# Altium PCB BMS.PcbDoc (part 2 of 3)
Units mm, origin at the board's own origin, x right, y up, seen from the top; angles counter-clockwise.
Board outline 84 x 70 mm, 4 copper layers (PWR, GND1, GND2, SIG), stack 1.586 mm thick; 200 components, 151 nets, 637 pads, 135 vias.
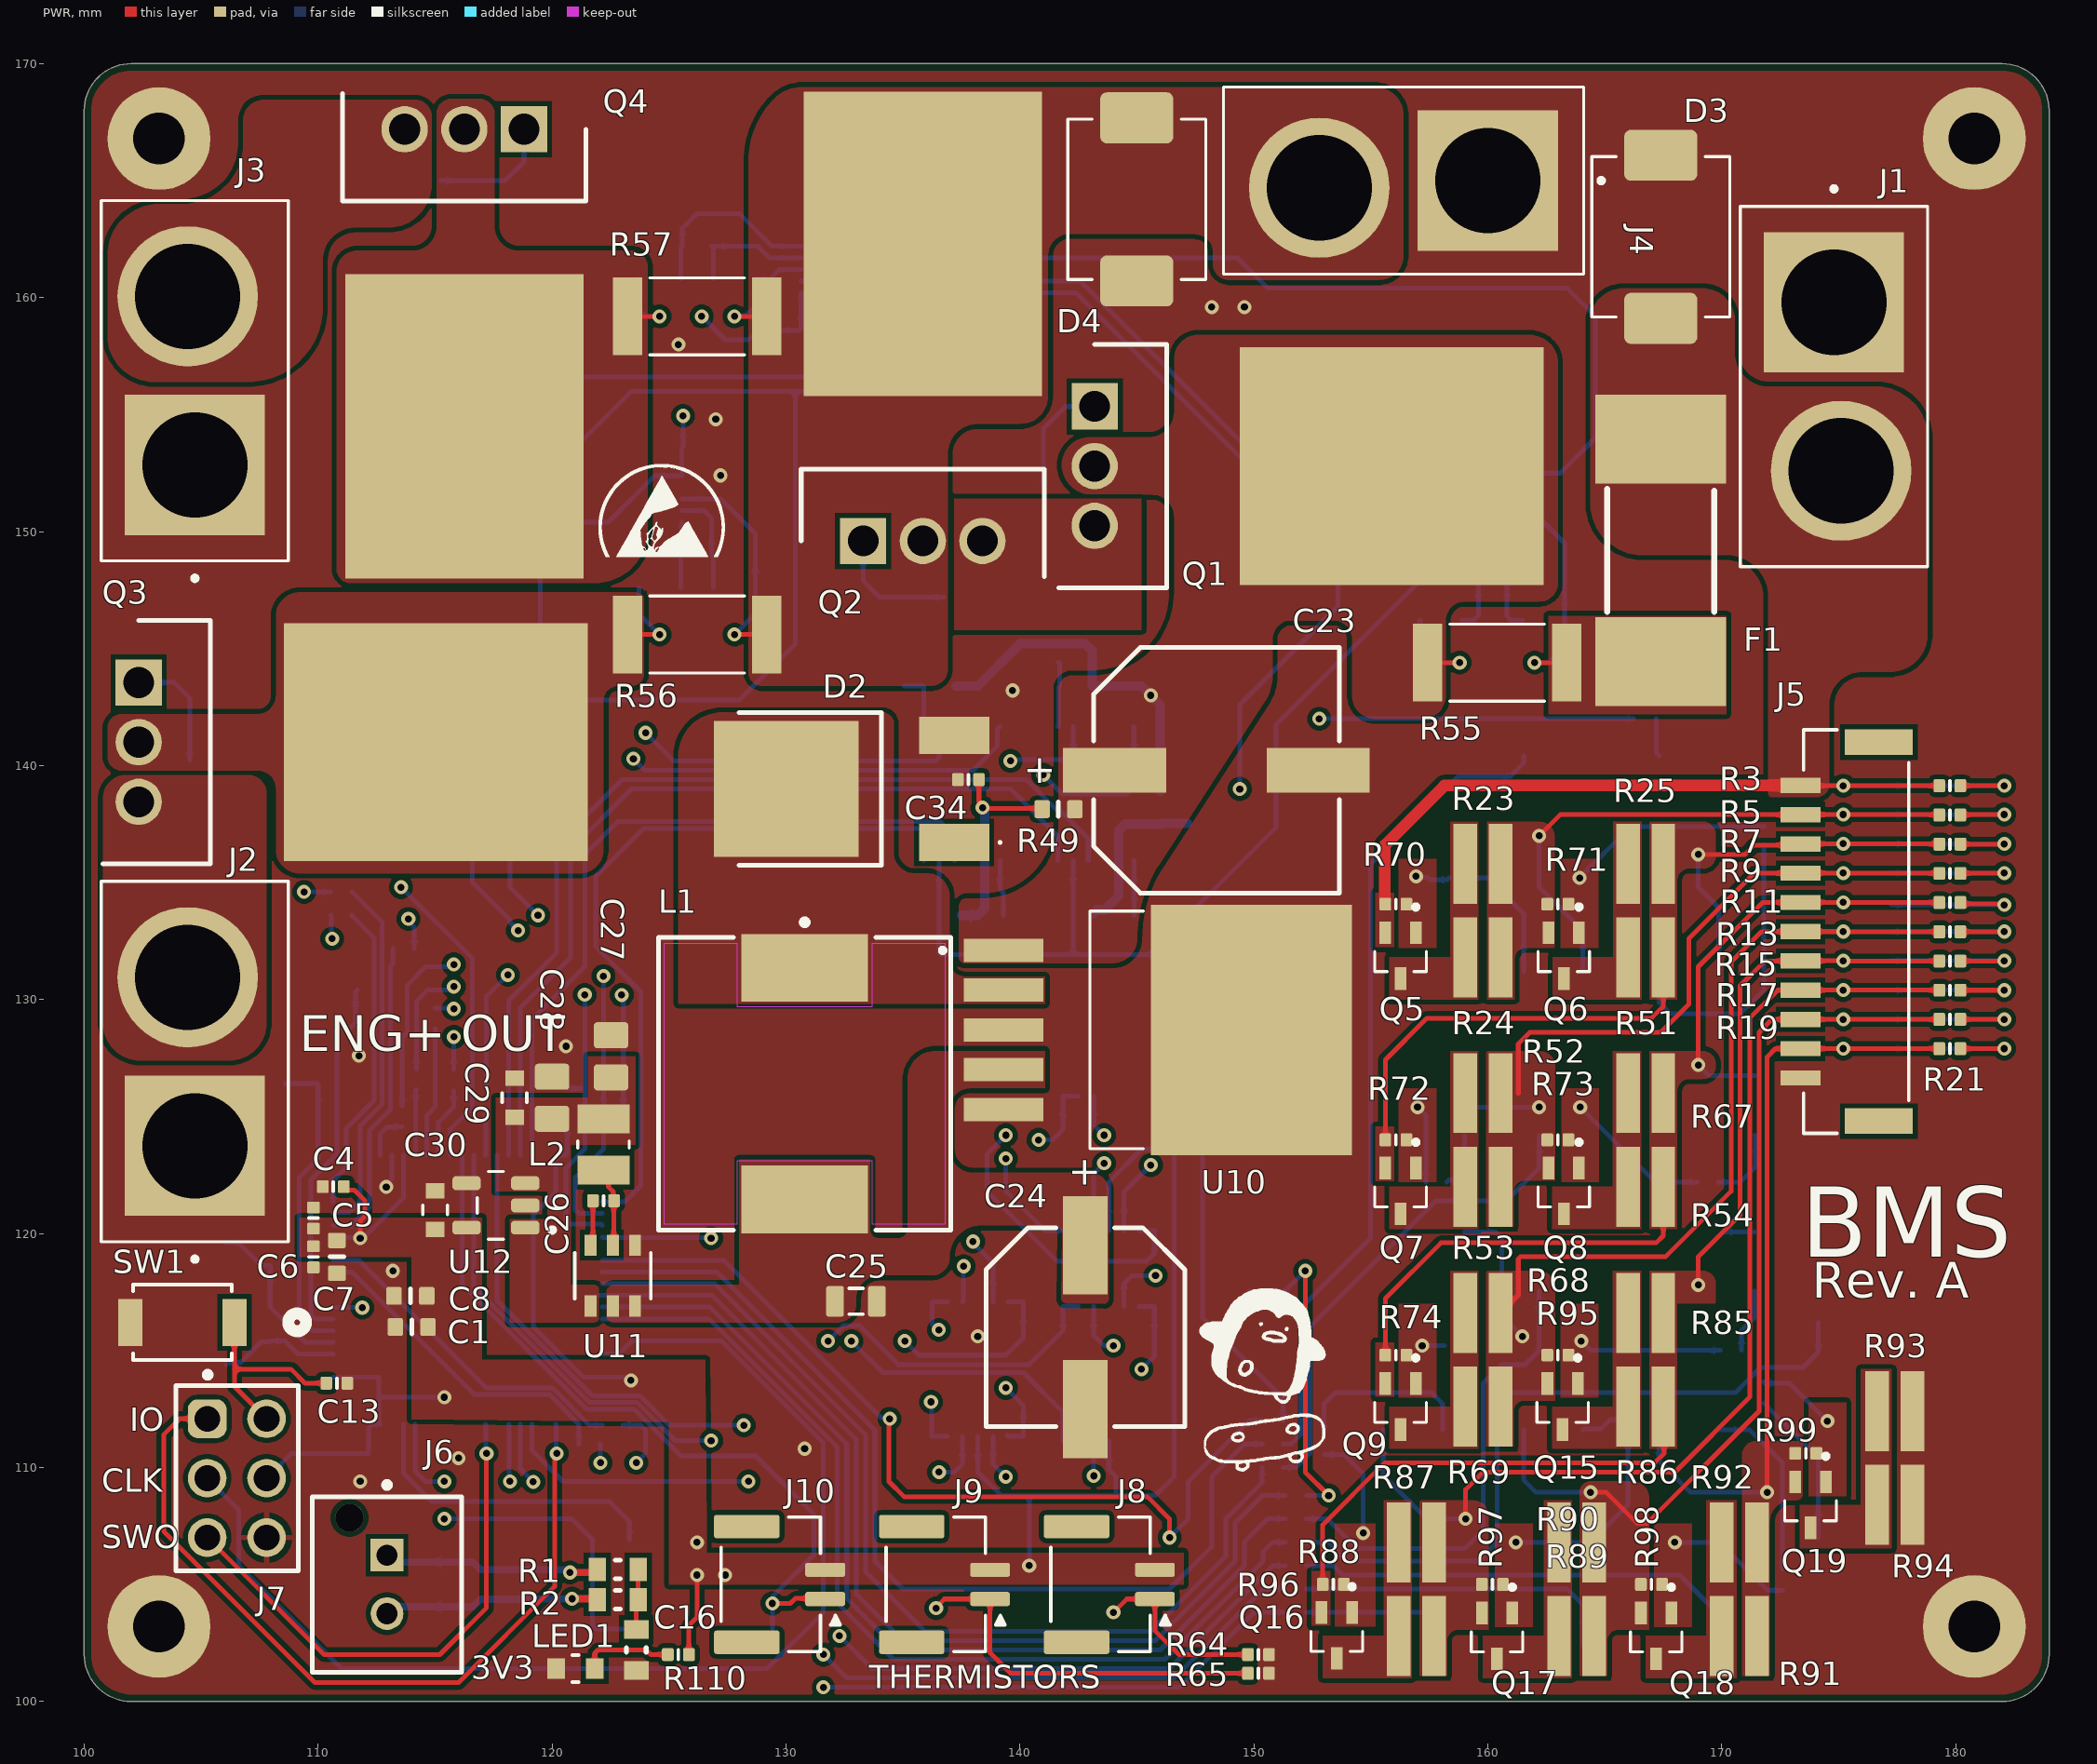
[diagram p0: PWR view]

## Part data (continued)
XTAL1: library part CMP-036-000000-1, "No Description Available", Manufacturer_Name="ECS International", Copyright="Copyright (C) 2025 Ultra Librarian. All rights reserved.", Design Item ID=ECS-.327-6-17X-TR, Manufacturer_Part_Number=ECS-.327-6-17X-TR, RefDes=RefDes, Source=ECS-P327-6-17X-TR.SchLib, Type=Type
XTAL2: library part CMP-039-000000-5, "No Description Available", Frequency=25MHz, Manufacturer_Name=YXC, Copyright="Copyright (C) 2025 Ultra Librarian. All rights reserved.", Design Item ID=X322525MOB4SI, Manufacturer_Part_Number=X322525MOB4SI, RefDes=RefDes, Source=X322525MOB4SI.SchLib, Type=Type

## Free pads (board coordinates)
  round 4.4 hole 2.2: 2(103.2,103.2) 2(103.2,166.8) 2(180.8,103.2) 2(180.8,166.8)

## Via types
v1: diameter 0.6, hole 0.3, PWR to SIG, 135 vias

## Nets (pads, with @x,y where several pads share a name; then routed paths per layer and width w, separated by ;. In a path a pad name is that pad's centre, name@x,y a point inside that pad or via, vN(x,y) a via of type N, cw(c..) or ccw(c..) an arc to the next point about the centre after c; other vN are vias at no path point)
ADC123_IN1-I2C3_SCL: U1.8
ADC123_IN2-I2C3_SDA: U1.9
AUX+: J3.2 Q4.3 R46.2
AUX+_SHUNTED: Q4.2 R42.2 R57.2 | length 3.7
  PWR w0.2: R57.2@123.225,159.2 v1(124.6,159.2)
  SIG w0.2: R42.2@123.71,160.8 123.71,159.49 124,159.2 v1(124.6,159.2)
AUX_DSG: Q4.1 R46.1 U14.12 | length 48.6
  GND1 w0.2: Q4.1@118.8,167.2 118.8,145 122.4,141.4 v1(124,141.4)
  SIG w0.2: R46.1@115.25,165 118,165 118.8,165.8 Q4.1@118.8,167.2 ; v1(124,141.4) 125.2,140.2 136.4,140.2 136.55,140.35 U14.12@136.55,141.67
AUX_DSG_EN: U1.33 U14.6 | length 32.1
  SIG w0.2: U1.33@122.15,121.35 123.1,121.35 123.8,122.05 123.8,130.325 121.86,132.265 121.86,135.26 123.911,137.311 135.689,137.311 135.9,137.1 U14.6@135.9,135.93
B+: D3.C F1.1 J1.2 J5.1 Q5.2 R3.2 R70.1 | length 27.3
  PWR w0.2: J5.1@173.371,139.15 173.383,139.138 v1(175.201,139.138) R3.2@179.305,139.138
  PWR w0.5: R70.1@155.625,134.075 155.6,134.1 155.6,136.6 158.15,139.15 J5.1@173.371,139.15
B+_FUSED: F1.2 R36.2 R55.1 U7.8 | length 11.9
  PWR w0.2: v1(162,144.4) R55.1@163.375,144.4
  SIG w0.2: U7.8@159.6,151.5 161.3,151.5 163.29,149.51 R36.2@163.29,146.2 163.29,145.09 162.6,144.4 v1(162,144.4)
BAT1: C32.2 C35.1 R47.2 U13.2 | length 7.4
  SIG w0.2: R47.2@146,137.5 R47.2@146.025,137.525 ; C32.2@147.175,137.525 C32.2@147.2,137.55
  SIG w0.4: C35.1@143.1,133.646 143.28,133.826 143.626,133.826 144.225,134.425 U13.2@144.225,135.93 144.225,137.225 144.5,137.5 R47.2@146,137.5 ; R47.2@146.025,137.525 C32.2@147.175,137.525
BAT2: C34.2 C36.1 R49.2 U14.2 | length 9.3
  PWR w0.2: C34.2@138.25,139.4 138.25,138.458 138.4,138.308 v1(138.4,138.2) 138.431,138.169 140.919,138.169 R49.2@140.95,138.137
  SIG w0.4: C36.1@137.5,133.6 138.2,133.6 138.5,133.9 U14.2@138.5,135.93 ; v1(138.4,138.2) 138.4,138.146 138.5,138.046 U14.2@138.5,135.93
BMS3.3V: C1.1 C2.2 C3.2 C4.2 C5.2 C6.1 C7.1 C8.1 C14.1 C15.1 C18.2 C20.2 C22.2 C30.2 J7.4 J8.2 J9.2 J10.2 R38.2 R58.2 R59.2 R110.2 U1.1 U1.13 U1.19 U1.32 U1.48 U1.64 U2.3 U3.4 U4.4 U5.4 U7.6 U8.1 U8.6 U9.2 U9.6 U12.5 U13.5 U14.5 | length 219.7
  PWR w0.2: C4.2@111.1,122 111.239,121.861 111.539,121.861 112,121.4 112,120.754 111.8,120.554 v1(111.8,119.8) ; R110.2@125.85,102 125.85,103.25 126.2,103.6 v1(126.2,105.4)
  GND1 w0.2: v1(125.6,154.946) 125.6,155.6 126.4,156.4 v1(126.4,159.2)
  GND2 w0.2: v1(122.98,130.193) 123.6,129.573 123.6,121.94 123.174,121.514 123.174,117.771 123.376,117.569 v1(123.376,113.717)
  SIG w0.2: J7.4@107.8,109.54 108.86,110.6 C2.2@112.15,110.6 112.15,111.655 112.345,111.85 U1.64@112.65,111.85 112.6,111.9 112.6,113 ; U1.1@110.65,113.85 112.6,113.85 112.6,113 ; U1.13@110.65,119.85 110.675,119.825 111.775,119.825 v1(111.8,119.8) 111.908,119.8 112.047,119.939 112.064,119.939 113.654,121.529 U1.19@113.654,123.346 ; v1(115.4,113) 112.6,113 ; R59.2@120.63,125.35 120.64,125.34 120.64,124.61 C3.2@120.65,124.6 120.65,123.435 120.565,123.35 U1.32@120.15,123.35 120.15,121.75 119.2,120.8 119.2,116 121.35,113.85 U1.48@122.15,113.85 123.135,113.85 123.268,113.717 v1(123.376,113.717) ; U8.1@121.25,150.4 122.4,150.4 124.4,152.4 U8.6@125.55,152.4 125.55,153.575 C20.2@125.575,153.6 125.6,153.625 v1(125.6,154.946) ; v1(122.98,130.193) 123.05,130.123 R58.2@123.05,125.4 ; v1(126.4,159.2) 127.4,158.2 128.4,158.2 128.8,158.6 C22.2@130.575,158.6 130.65,158.675 U9.6@130.65,160.2 132.6,160.2 134.1,161.7 U9.2@134.95,161.7 149.3,161.7 150.6,160.4 163.4,160.4 164.6,159.2 164.6,154 163.1,152.5 U7.6@159.6,152.5 ; U14.5@136.55,135.93 136.55,132 136.625,131.925 142.275,131.925 ; U4.4@138.2,111.33 138.2,109.8 139.2,108.8 140.4,108.8 ; v1(140.4,105.8) 140.4,108.8 ; U13.5@142.275,135.93 142.275,131.925 ; U3.4@143.8,111.13 143.8,109.919 144.1,109.619 144.1,108.85 144.05,108.8 ; U5.4@143.8,120.13 143.8,122.2 145.2,123.6 146.6,123.6 ; R38.2@155.45,149.6 158.2,149.6 ; C18.2@159.775,153.6 159.775,152.54 159.735,152.5 U7.6@159.6,152.5 ; 140.4,108.8 144.05,108.8 ; 142.275,131.925 145.525,131.925 ; 144.05,108.8 145.791,108.8 146.6,109.609 146.6,123.6 ; 145.525,131.925 150.946,137.346 150.946,141.746 158.2,149 158.2,149.6 ; 145.525,131.925 146.6,130.85 146.6,123.6 ; 158.2,149.6 158.2,152.2 158.5,152.5 U7.6@159.6,152.5
  other v1: 127.4,105.4 126.2,106.8
BMS5V: C27.2 C28.2 C29.2 L2.2 U11.1 U12.1 U12.3
BMS12V: C24.1 C25.1 L1.2 U10.4 U11.2 U11.3
BMS+: C23.1 Q1.2 R37.2 R47.1 R48.1 R49.1 R50.1 R55.2 U10.1 | length 19.6
  PWR w0.2: R55.2@157.425,144.4 v1(158.8,144.4)
  SIG w0.2: R37.2@157.11,146.2 157.11,145.09 157.8,144.4 v1(158.8,144.4)
  SIG w0.4: R50.1@137.275,143.4 138.2,143.4 140,145.2 142.8,145.2 143.1,144.9 R48.1@143.1,143.4 145.2,143.4 v1(145.6,143) 146,142.6 R47.1@146,138.9

## Text inside footprints (layer, text, board x,y; h text height)
U11: Top Assembly "*" at 122.448,117.413 h1.27 r90
XTAL1: Bottom Assembly "*" at 107.238,115.555 h1.27 r270